# Altium PCB TrafficLightHeaderBoard.PcbDoc
Units mm, origin at the board's own origin, x right, y up, seen from the top; angles counter-clockwise.
Board outline 50 x 50 mm, 2 copper layers (Top Layer, Bottom Layer); 6 components, 7 nets, 23 pads, 0 vias.
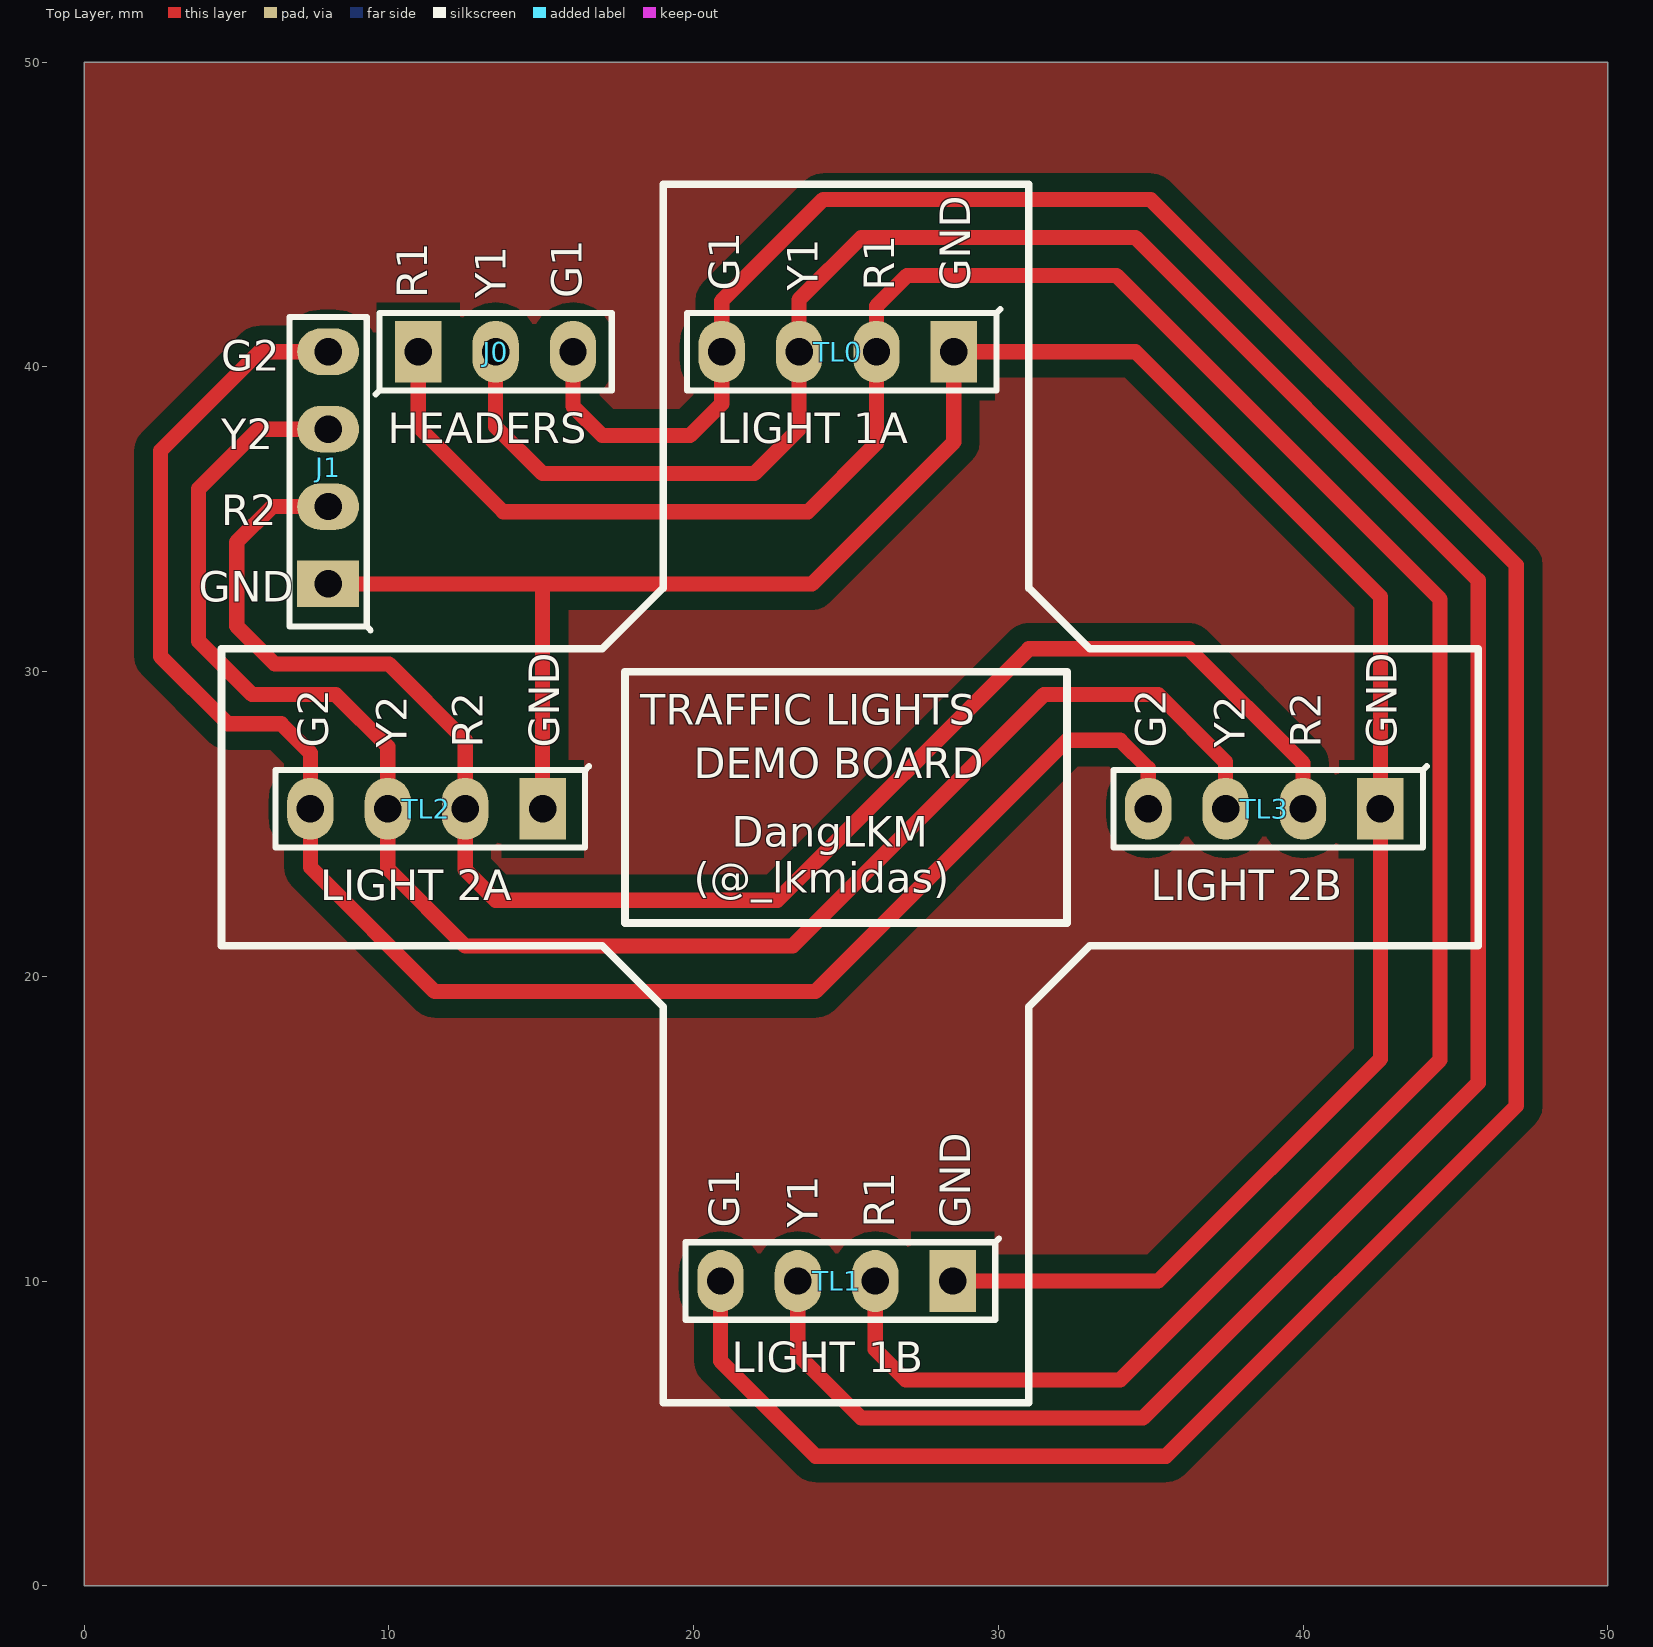
[diagram p0: Top Layer view]
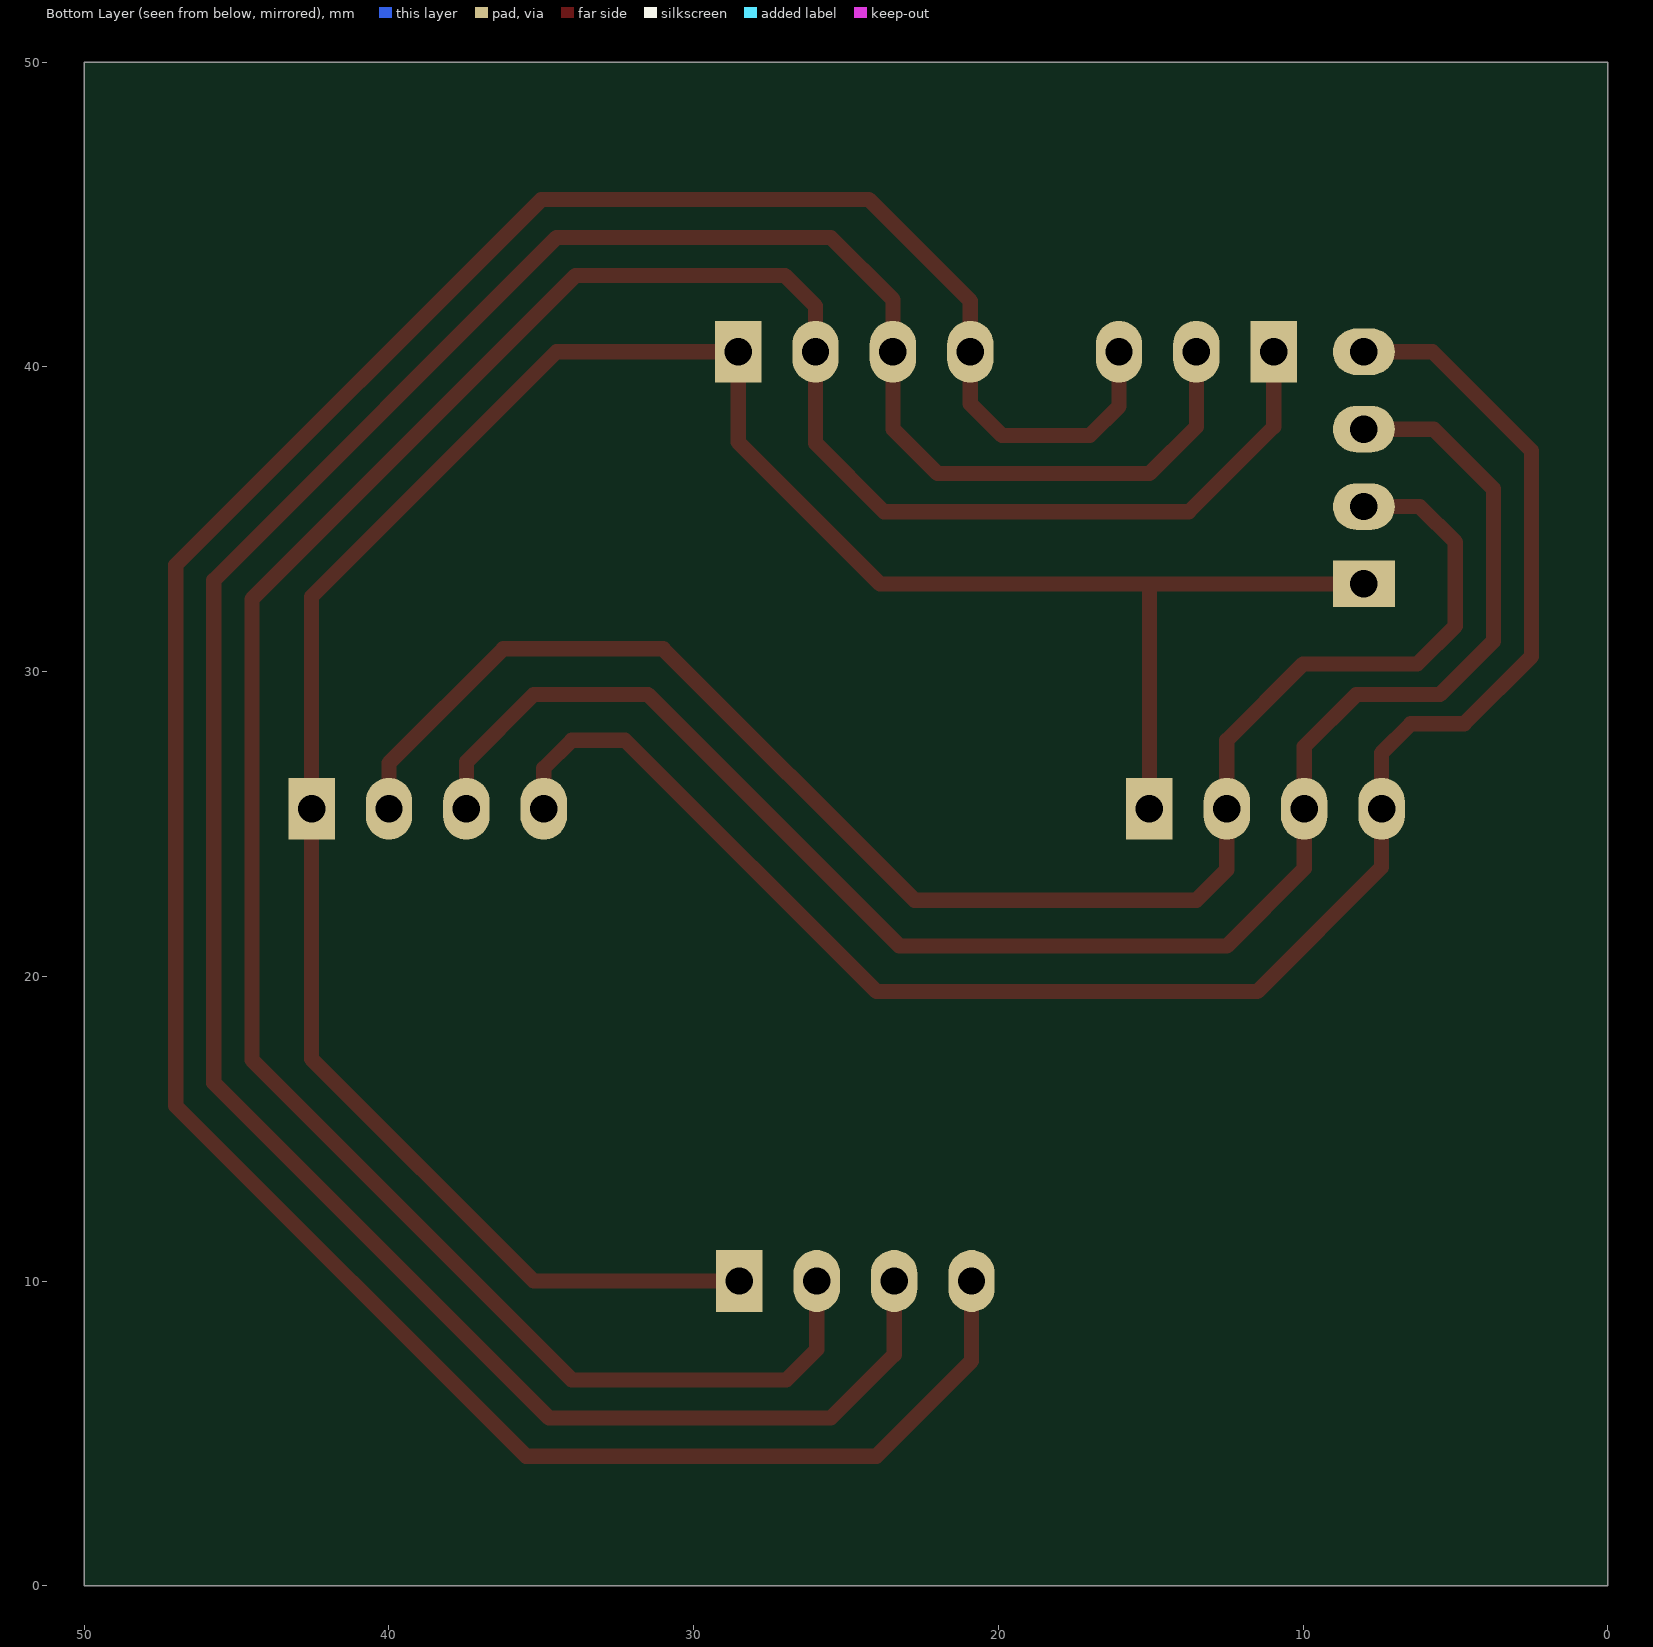
[diagram p1: Bottom Layer view, seen from below]
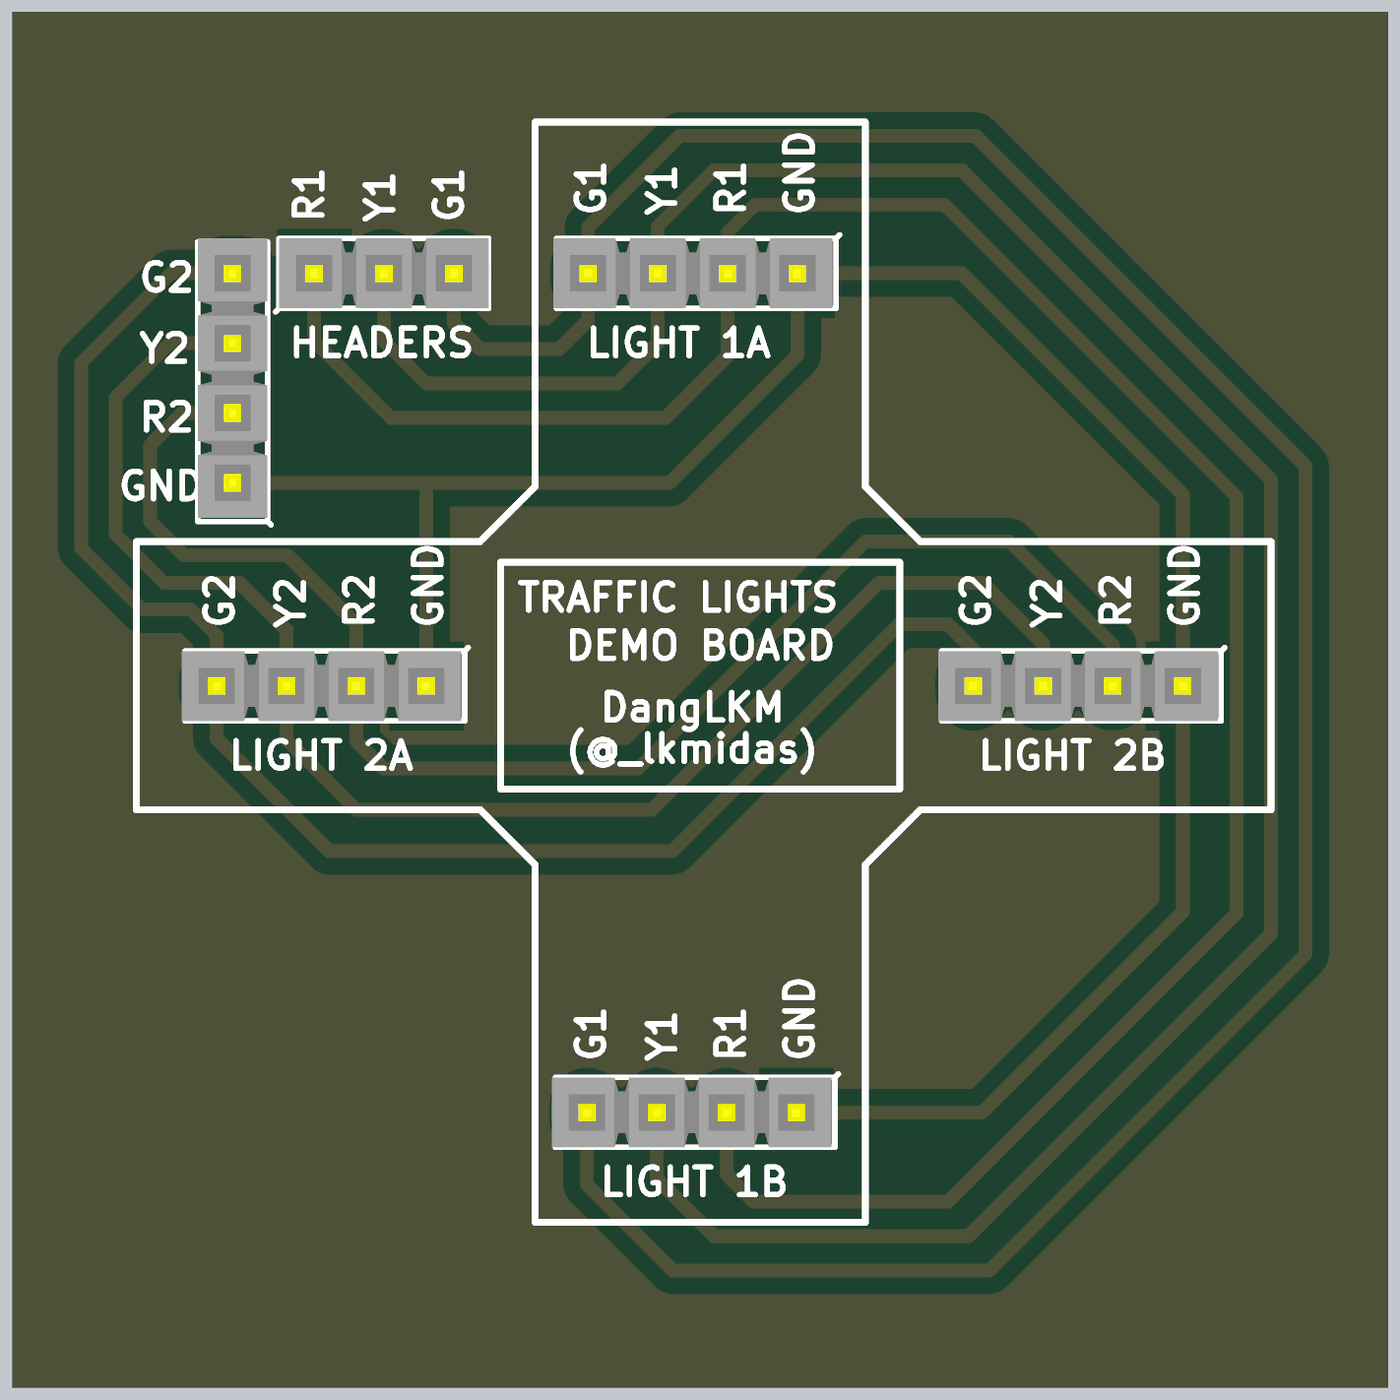
[diagram p2: 3D render of the assembled board from above, using the file's embedded part models]

## Layer stack, top to bottom
Top Solder: solder mask 0.0102, Solder Resist, Dk 3.5
Top Layer: signal copper 0.0356
Dielectric 1: dielectric 0.32, FR-4, Dk 4.8
Bottom Layer: signal copper 0.0356
Bottom Solder: solder mask 0.0102, Solder Resist, Dk 3.5

## Board outline
0,0 50,0 50,50 0,50

## Design rules (kind name [scope] priority, off if disabled: settings)
Clearance [All] p1: gap=0.254 ignorepadtopadclearanceinfootprint=FALSE except(0.6: Arc-Fill Arc-Poly Arc-Region Track-Fill Track-Poly Track-Region SMDPad-Fill SMDPad-Poly SMDPad-Region THPad-Fill THPad-Poly THPad-Region Via-Fill Via-Poly Via-Region Fill-Fill Fill-Poly Fill-Region Poly-Poly Poly-Region Region-Region)
HoleSize [All] p1: absolutevalues=TRUE maxlimit=10 minlimit=0.025 maxpercent=80.000 minpercent=20.000
PolygonConnect [All] p1: connectstyle=Relief reliefconductorwidth=0.254 reliefentries=4 polygonreliefangle="90 Angle" airgapwidth=0.254
RoutingVias [All] p1: holewidth=0.711 width=1.27 viastyle="Through Hole" minholewidth=0.711 minwidth=1.27 maxholewidth=0.711 maxwidth=1.27
SilkToSilkClearance [All] p1 off: silktosilkclearance=0.254
SilkToSolderMaskClearance [IsPad] p1 off: minsilkscreentomaskgap=0.254 clearancetoexposedcopper=TRUE
SolderMaskExpansion [All] p1: expansion=0.102
Width [All] p1: maxlimit=0.5 minlimit=0.5 preferedwidth=0.5
27 further rules are at their usual default settings.

## Components (designator, comment, footprint, x,y, rotation, side; value= is the part's Value field where it differs from the comment)
J0 "Header 3" "Header 3" 10.96,40.5 r0 top
J1 "Header 4" "Header 4" 8,32.88 r90 top
TL0 "Header 4" "Header 4" 28.54,40.5 r180 top
TL1 "Header 4" "Header 4" 28.5,10 r180 top
TL2 "Header 4" "Header 4" 15.04,25.5 r180 top
TL3 "Header 4" "Header 4" 42.54,25.5 r180 top

## Footprints (in the part's own frame and the unit in brackets; to place one, negate y for a bottom-side part, rotate by r counter-clockwise, add the part's x,y. Pads: shape width x height; smd on the part's side, far side on the other; paste and mask are expansions set on the pad)
"Header 3" [mil]
  rect 60x80 hole 35.43: 1(0,0)
  oval 60x80 hole 35.43: 2(100,0) 3(200,0)
  silkscreen extent -55,-55 250,50, body extent -50,-50 250,50, height 350
"Header 4" [mil]
  rect 60x80 hole 35.43: 1(0,0)
  oval 60x80 hole 35.43: 2(100,0) 3(200,0) 4(300,0)
  silkscreen extent -60,-55 345,50, body extent -50,-50 350,50, height 350

## Part data
J0: "Header, 3-Pin"
J1 TL0 TL1 TL2 TL3: "Header, 4-Pin"

## Nets (pads, with @x,y where several pads share a name; then routed paths per layer and width w, separated by ;. In a path a pad name is that pad's centre, name@x,y a point inside that pad or via, vN(x,y) a via of type N, cw(c..) or ccw(c..) an arc to the next point about the centre after c; other vN are vias at no path point)
G1: J0.3 TL0.4 TL1.4 | length 95.9
  Top Layer w0.5: J0.3 16.04,38.71 17,37.75 19.88,37.75 20.92,38.79 TL0.4 20.92,42.17 24.25,45.5 35,45.5 47,33.5 47,15.75 35.5,4.25 24,4.25 20.88,7.37 TL1.4
G2: J1.4 TL2.4 TL3.4 | length 57.9
  Top Layer w0.5: J1.4 5.75,40.5 2.5,37.25 2.5,30.5 4.71,28.29 6.46,28.29 7.42,27.33 TL2.4 7.42,23.58 11.5,19.5 24,19.5 32.25,27.75 34,27.75 34.92,26.83 TL3.4
GND: J1.1 TL0.1 TL1.1 TL2.1 TL3.1 | length 82.4
  Top Layer w0.5: J1.1 15,32.88 ; TL2.1 15.04,32.84 15,32.88 ; TL1.1 35.25,10 42.54,17.29 TL3.1 42.54,32.46 34.5,40.5 TL0.1 28.54,37.54 23.88,32.88 15,32.88
R1: J0.1 TL0.2 TL1.2 | length 88.1
  Top Layer w0.5: J0.1 10.96,38.04 13.75,35.25 23.75,35.25 26,37.5 TL0.2 26,42 27,43 33.88,43 44.5,32.38 44.5,17.25 34,6.75 26.96,6.75 25.96,7.75 TL1.2
R2: J1.2 TL2.2 TL3.2 | length 53.9
  Top Layer w0.5: J1.2 6.17,35.42 5,34.25 5,31.5 6.25,30.25 10,30.25 12.5,27.75 TL2.2 12.5,23.5 13.5,22.5 22.75,22.5 31,30.75 36.25,30.75 40,27 TL3.2
Y1: J0.2 TL0.3 TL1.3 | length 92.4
  Top Layer w0.5: J0.2 13.5,38.04 15.04,36.5 22,36.5 23.46,37.96 TL0.3 23.46,42.21 25.5,44.25 34.5,44.25 45.75,33 45.75,16.5 34.75,5.5 25.5,5.5 23.42,7.58 TL1.3
Y2: J1.3 TL2.3 TL3.3 | length 56.1
  Top Layer w0.5: J1.3 5.71,37.96 3.75,36 3.75,31 5.5,29.25 8.25,29.25 9.96,27.54 TL2.3 9.96,23.54 12.5,21 23.25,21 31.5,29.25 35.25,29.25 37.46,27.04 TL3.3

## Polygon pours and split planes (outlines as drawn)
no net on Top Layer (solid, pour order 0): 0,0 50,0 50,50 0,50

## Silkscreen, mask and mechanical layers (free items; w line width, h text height)
Top Overlay:
  lines w0.254: 4.5,21 4.5,30.75 17,30.75 19,32.75 19,46 31,46 31,32.75 33,30.75 45.75,30.75 45.75,21 44.75,21 33,21 31,19 31,6 19,6 19,19 17,21 15.75,21 4.5,21 ; 17.75,21.75 17.75,30 32.25,30 32.25,21.75 17.75,21.75
  text "G1" at 21.5,42.5 h1 r90
  text "Y1" at 24.08,42.5 h1 r90
  text "R1" at 26.58,42.5 h1 r90
  text "GND" at 29.08,42.5 h1 r90
  text "R1" at 11.25,42.25 h1 r90
  text "Y1" at 13.83,42.25 h1 r90
  text "G1" at 16.33,42.25 h1 r90
  text "G2" at 4.5,39.88 h1
  text "HEADERS" at 9.96,37.5 h1
  text "LIGHT 1A" at 20.75,37.5 h1
  text "Y2" at 4.5,37.3 h1
  text "R2" at 4.5,34.8 h1
  text "GND" at 3.75,32.3 h1
  text "TRAFFIC LIGHTS" at 18.25,28.25 h1
  text "G2" at 8,27.5 h1 r90
  text "Y2" at 10.58,27.5 h1 r90
  text "R2" at 13.08,27.5 h1 r90
  text "GND" at 15.58,27.5 h1 r90
  text "G2" at 35.5,27.5 h1 r90
  text "Y2" at 38.08,27.5 h1 r90
  text "R2" at 40.58,27.5 h1 r90
  text "GND" at 43.08,27.5 h1 r90
  text "DEMO BOARD" at 20,26.5 h1
  text "DangLKM" at 21.25,24.25 h1
  text "(@_lkmidas)" at 20,22.75 h1
  text "LIGHT 2A" at 7.75,22.5 h1
  text "LIGHT 2B" at 35,22.5 h1
  text "G1" at 21.5,11.75 h1 r90
  text "Y1" at 24.08,11.75 h1 r90
  text "R1" at 26.58,11.75 h1 r90
  text "GND" at 29.08,11.75 h1 r90
  text "LIGHT 1B" at 21.25,7 h1